# EAGLE board pcb_panel (EAGLE 6.5.0)
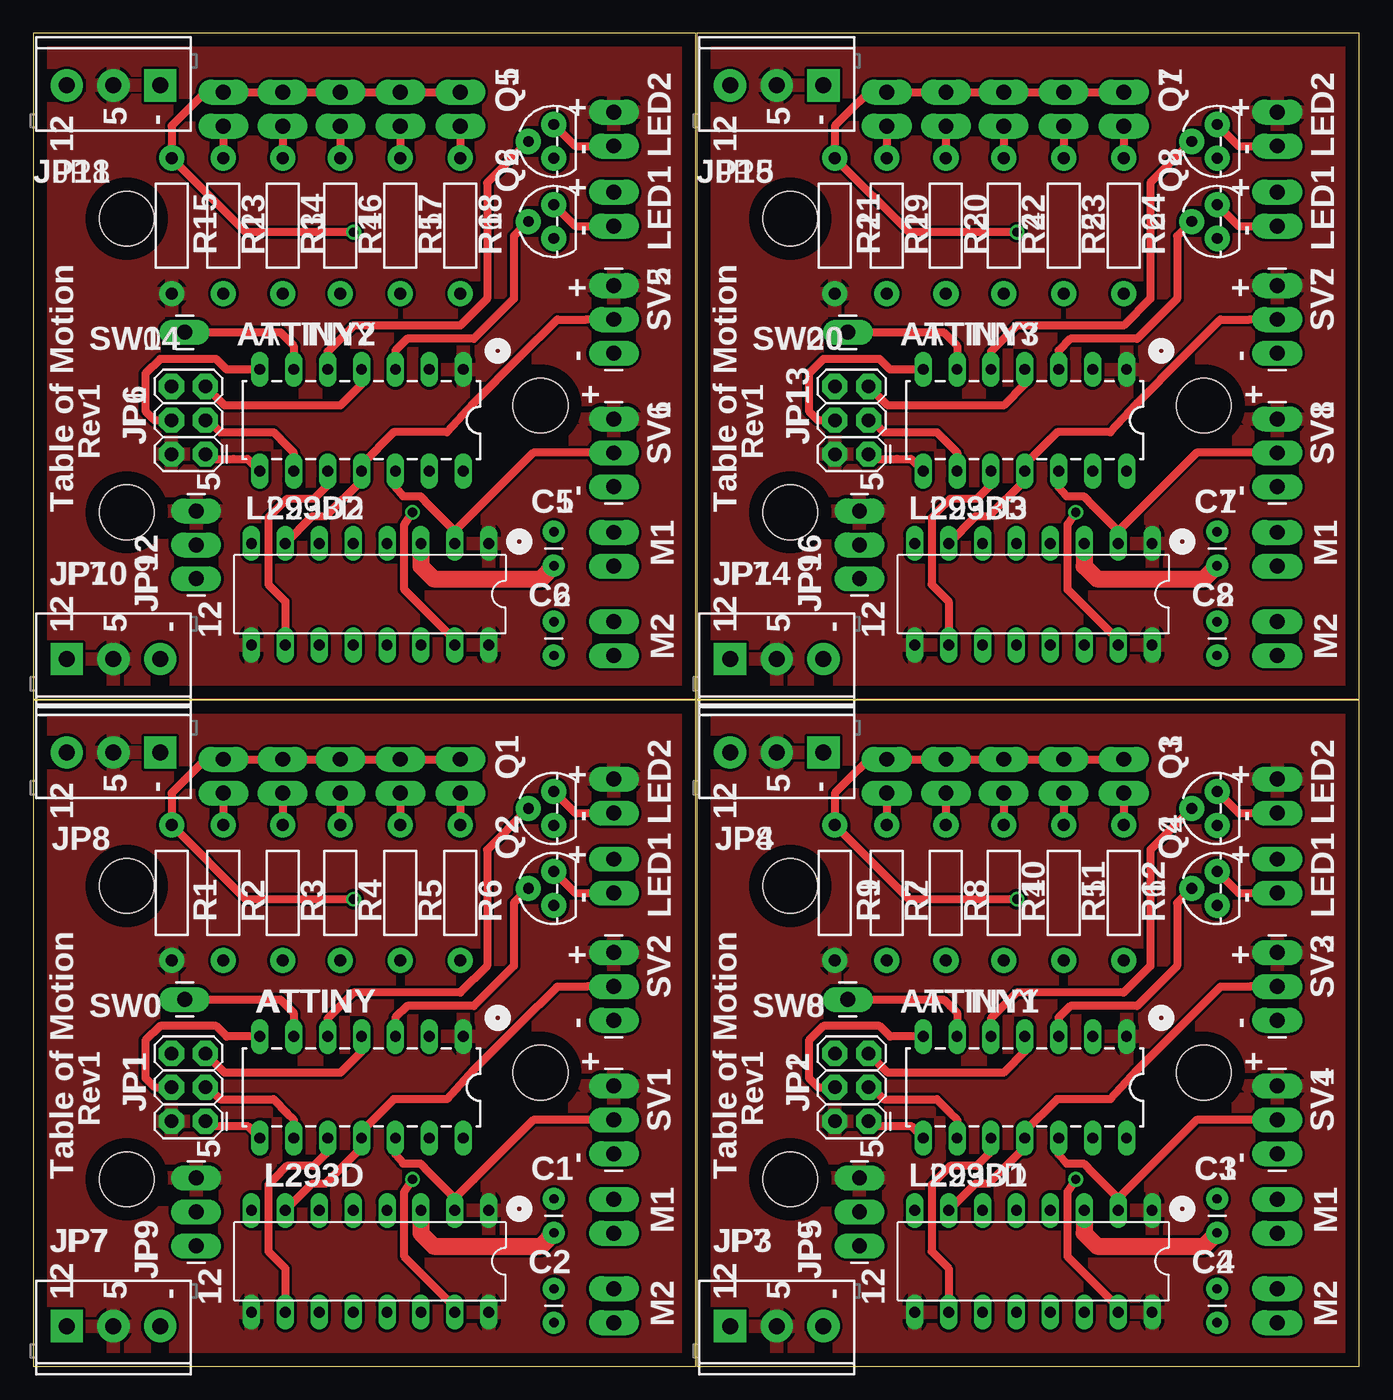
[diagram p0: board, top side]
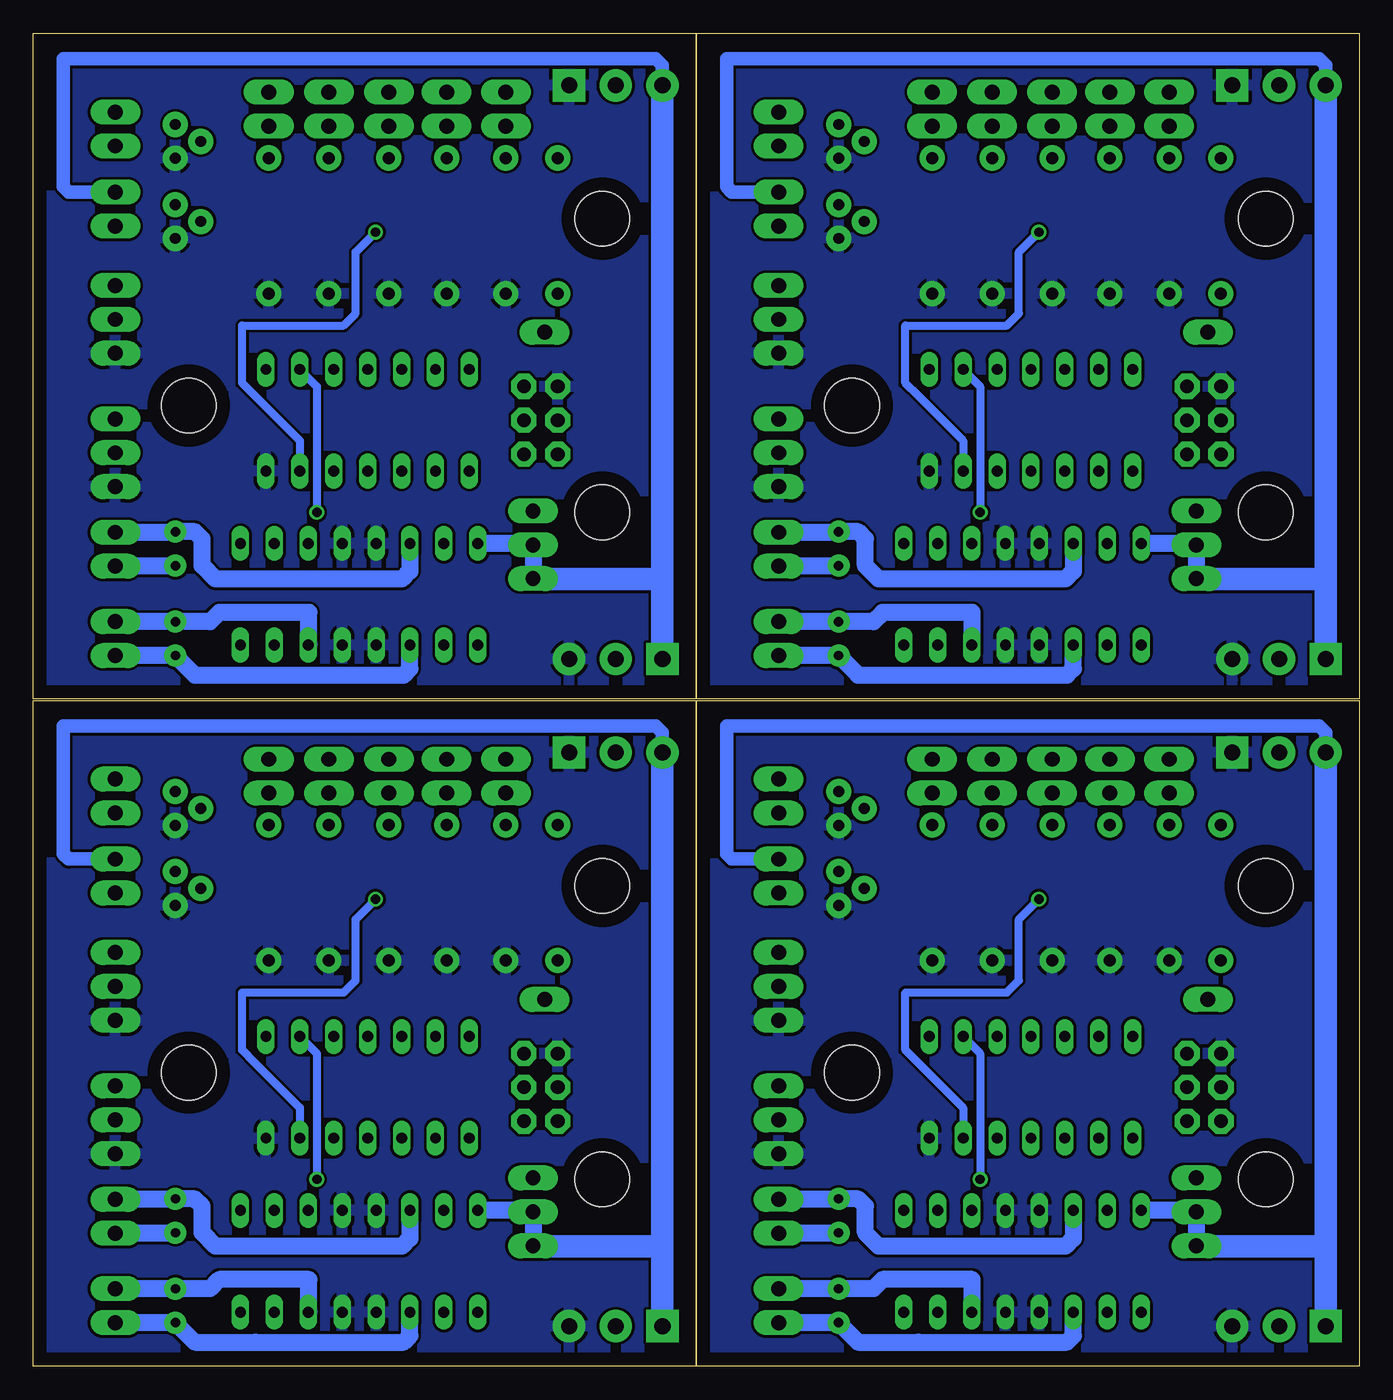
[diagram p1: board, bottom side, seen from below]

Size 99.34 x 99.9 mm. Coordinates in mm from the lower left corner, seen from the top.
Outline: 0,0 49.64,0 49.64,49.9 0,49.9 0,0
Outline: 49.7,0 99.34,0 99.34,49.9 49.7,49.9 49.7,0
Outline: 0,50 49.64,50 49.64,99.9 0,99.9 0,50
Outline: 49.7,50 99.34,50 99.34,99.9 49.7,99.9 49.7,50
Copper layers (1*16): Top 0.035mm / dielectric 1.5mm / Bottom 0.035mm
Design rules "default": minimum track width 10mil, minimum drill 24mil, track to track 8mil, track to pad 8mil, pad to pad 8mil, via to via 8mil, smd to smd 8mil, copper to edge 40mil, drill to drill 8mil, minimum pad ring 10mil, minimum via ring 8mil, stop-mask expansion 4mil, vias tented up to drill 0mil, thermal gap 10mil
Holes 4.1 mm at 7,36 7,14 38,22 56.7,36 56.7,14 87.7,22 7,86 7,64 38,72 56.7,86 56.7,64 87.7,72

## Footprints (pad centres in the part's own frame; a part is rotated, then mirrored left to right if it is on the bottom)
DIL14 = drill 0.813 long: 1 -8.89,-3.81; 2 -6.35,-3.81; 3 -3.81,-3.81; 4 -1.27,-3.81; 5 1.27,-3.81; 6 3.81,-3.81; 7 6.35,-3.81; 8 6.35,3.81; 9 3.81,3.81; 10 1.27,3.81; 11 -1.27,3.81; 12 -3.81,3.81; 13 -6.35,3.81; 14 -8.89,3.81
CAP-PTH-SMALL = drill 0.7 pad 1.651: 1 0,0; 2 2.54,0
2X3 = drill 1.016 pad 1.88 octagon: 1 0,0; 2 0,2.54; 3 2.54,0; 4 2.54,2.54; 5 5.08,0; 6 5.08,2.54
SCREWTERMINAL-3.5MM-3 = drill 1.2 pad 2.413 square: 1 0,0 | drill 1.2 pad 2.413: 2 3.5,0; 3 7,0
1X03_LONGPADS = drill 1.118 pad 1.88 long: 1 0,0; 2 2.54,0; 3 5.08,0
DIL16 = drill 0.813 long: 1 -8.89,-3.81; 2 -6.35,-3.81; 3 -3.81,-3.81; 4 -1.27,-3.81; 5 1.27,-3.81; 6 3.81,-3.81; 7 6.35,-3.81; 8 8.89,-3.81; 9 8.89,3.81; 10 6.35,3.81; 11 3.81,3.81; 12 1.27,3.81; 13 -1.27,3.81; 14 -3.81,3.81; 15 -6.35,3.81; 16 -8.89,3.81
1X02_LONGPADS = drill 1.118 pad 1.88 long: 1 0,0; 2 2.54,0
TO-92 = drill 0.813 pad 1.88: 1 -1.27,0; 2 0,1.905; 3 1.27,0
AXIAL-0.4 = drill 0.9 pad 1.88: P$1 -5.08,0; P$2 5.08,0
1X01_LONGPAD = drill 1.118 pad 1.88 long: 1 0,0

## Placement (x,y rotation side)
ATTINY  ATTINY84ATTINY84-20PU  [DIL14]  23.32,20.9 180 top
ATTINY1  ATTINY84ATTINY84-20PU  [DIL14]  73.02,20.9 180 top
ATTINY2  ATTINY84ATTINY84-20PU  [DIL14]  23.32,70.9 180 top
ATTINY3  ATTINY84ATTINY84-20PU  [DIL14]  73.02,70.9 180 top
C1  [CAP-PTH-SMALL]  39,10 90 top
C2  [CAP-PTH-SMALL]  39,5.8 270 top
C3  [CAP-PTH-SMALL]  88.7,10 90 top
C4  [CAP-PTH-SMALL]  88.7,5.8 270 top
C5  [CAP-PTH-SMALL]  39,60 90 top
C6  [CAP-PTH-SMALL]  39,55.8 270 top
C7  [CAP-PTH-SMALL]  88.7,60 90 top
C8  [CAP-PTH-SMALL]  88.7,55.8 270 top
JP1  [2X3]  12.89,18.36 90 top
JP2  [2X3]  62.59,18.36 90 top
JP3  [SCREWTERMINAL-3.5MM-3]  52.2,3 0 top
JP4  [SCREWTERMINAL-3.5MM-3]  59.2,46 180 top
JP5  [1X03_LONGPADS]  61.9,14.1 270 top
JP6  [2X3]  12.89,68.36 90 top
JP7  [SCREWTERMINAL-3.5MM-3]  2.5,3 0 top
JP8  [SCREWTERMINAL-3.5MM-3]  9.5,46 180 top
JP9  [1X03_LONGPADS]  12.2,14.1 270 top
JP10  [SCREWTERMINAL-3.5MM-3]  2.5,53 0 top
JP11  [SCREWTERMINAL-3.5MM-3]  9.5,96 180 top
JP12  [1X03_LONGPADS]  12.2,64.1 270 top
JP13  [2X3]  62.59,68.36 90 top
JP14  [SCREWTERMINAL-3.5MM-3]  52.2,53 0 top
JP15  [SCREWTERMINAL-3.5MM-3]  59.2,96 180 top
JP16  [1X03_LONGPADS]  61.9,64.1 270 top
L293D  L293D  [DIL16]  25.23,7.86 180 top
L293D1  L293D  [DIL16]  74.93,7.86 180 top
L293D2  L293D  [DIL16]  25.23,57.86 180 top
L293D3  L293D  [DIL16]  74.93,57.86 180 top
LED1  M02PTH3  [1X02_LONGPADS]  43.5,38 270 top
LED2  M02PTH3  [1X02_LONGPADS]  43.5,44 270 top
LED3  M02PTH3  [1X02_LONGPADS]  93.2,38 270 top
LED4  M02PTH3  [1X02_LONGPADS]  93.2,44 270 top
LED5  M02PTH3  [1X02_LONGPADS]  43.5,88 270 top
LED6  M02PTH3  [1X02_LONGPADS]  43.5,94 270 top
LED7  M02PTH3  [1X02_LONGPADS]  93.2,88 270 top
LED8  M02PTH3  [1X02_LONGPADS]  93.2,94 270 top
M1  M02PTH3  [1X02_LONGPADS]  43.5,12.5 270 top
M2  M02PTH3  [1X02_LONGPADS]  43.5,5.8 270 top
M3  M02PTH3  [1X02_LONGPADS]  93.2,5.8 270 top
M4  M02PTH3  [1X02_LONGPADS]  93.2,12.5 270 top
M5  M02PTH3  [1X02_LONGPADS]  43.5,55.8 270 top
M6  M02PTH3  [1X02_LONGPADS]  43.5,62.5 270 top
M7  M02PTH3  [1X02_LONGPADS]  93.2,55.8 270 top
M8  M02PTH3  [1X02_LONGPADS]  93.2,62.5 270 top
Q1  MOSFET-NCHANNEL2N7000  [TO-92]  39,41.8 90 top
Q2  MOSFET-NCHANNEL2N7000  [TO-92]  39,35.8 90 top
Q3  MOSFET-NCHANNEL2N7000  [TO-92]  88.7,41.8 90 top
Q4  MOSFET-NCHANNEL2N7000  [TO-92]  88.7,35.8 90 top
Q5  MOSFET-NCHANNEL2N7000  [TO-92]  39,91.8 90 top
Q6  MOSFET-NCHANNEL2N7000  [TO-92]  39,85.8 90 top
Q7  MOSFET-NCHANNEL2N7000  [TO-92]  88.7,91.8 90 top
Q8  MOSFET-NCHANNEL2N7000  [TO-92]  88.7,85.8 90 top
R1  [AXIAL-0.4]  10.36,35.48 270 top
R2  [AXIAL-0.4]  14.24,35.48 90 top
R3  [AXIAL-0.4]  18.68,35.48 90 top
R4  [AXIAL-0.4]  23,35.48 90 top
R5  [AXIAL-0.4]  27.5,35.48 90 top
R6  [AXIAL-0.4]  32,35.48 90 top
R7  [AXIAL-0.4]  63.94,35.48 90 top
R8  [AXIAL-0.4]  68.38,35.48 90 top
R9  [AXIAL-0.4]  60.06,35.48 270 top
R10  [AXIAL-0.4]  72.7,35.48 90 top
R11  [AXIAL-0.4]  77.2,35.48 90 top
R12  [AXIAL-0.4]  81.7,35.48 90 top
R13  [AXIAL-0.4]  14.24,85.48 90 top
R14  [AXIAL-0.4]  18.68,85.48 90 top
R15  [AXIAL-0.4]  10.36,85.48 270 top
R16  [AXIAL-0.4]  23,85.48 90 top
R17  [AXIAL-0.4]  27.5,85.48 90 top
R18  [AXIAL-0.4]  32,85.48 90 top
R19  [AXIAL-0.4]  63.94,85.48 90 top
R20  [AXIAL-0.4]  68.38,85.48 90 top
R21  [AXIAL-0.4]  60.06,85.48 270 top
R22  [AXIAL-0.4]  72.7,85.48 90 top
R23  [AXIAL-0.4]  77.2,85.48 90 top
R24  [AXIAL-0.4]  81.7,85.48 90 top
SV1  [1X03_LONGPADS]  43.5,21 270 top
SV2  [1X03_LONGPADS]  43.5,31 270 top
SV3  [1X03_LONGPADS]  93.2,31 270 top
SV4  [1X03_LONGPADS]  93.2,21 270 top
SV5  [1X03_LONGPADS]  43.5,81 270 top
SV6  [1X03_LONGPADS]  43.5,71 270 top
SV7  [1X03_LONGPADS]  93.2,81 270 top
SV8  [1X03_LONGPADS]  93.2,71 270 top
SW0  M01PTH_LONGPAD  [1X01_LONGPAD]  11.33,27.49 270 top
SW1  M02PTH3  [1X02_LONGPADS]  14.24,45.49 270 top
SW2  M02PTH3  [1X02_LONGPADS]  18.68,45.49 270 top
SW3  M02PTH3  [1X02_LONGPADS]  23,45.49 270 top
SW4  M02PTH3  [1X02_LONGPADS]  27.5,45.49 270 top
SW5  M02PTH3  [1X02_LONGPADS]  32,45.49 270 top
SW6  M02PTH3  [1X02_LONGPADS]  63.94,45.49 270 top
SW7  M02PTH3  [1X02_LONGPADS]  68.38,45.49 270 top
SW8  M01PTH_LONGPAD  [1X01_LONGPAD]  61.03,27.49 270 top
SW9  M02PTH3  [1X02_LONGPADS]  72.7,45.49 270 top
SW10  M02PTH3  [1X02_LONGPADS]  77.2,45.49 270 top
SW11  M02PTH3  [1X02_LONGPADS]  81.7,45.49 270 top
SW12  M02PTH3  [1X02_LONGPADS]  14.24,95.49 270 top
SW13  M02PTH3  [1X02_LONGPADS]  18.68,95.49 270 top
SW14  M01PTH_LONGPAD  [1X01_LONGPAD]  11.33,77.49 270 top
SW15  M02PTH3  [1X02_LONGPADS]  23,95.49 270 top
SW16  M02PTH3  [1X02_LONGPADS]  27.5,95.49 270 top
SW17  M02PTH3  [1X02_LONGPADS]  32,95.49 270 top
SW18  M02PTH3  [1X02_LONGPADS]  63.94,95.49 270 top
SW19  M02PTH3  [1X02_LONGPADS]  68.38,95.49 270 top
SW20  M01PTH_LONGPAD  [1X01_LONGPAD]  61.03,77.49 270 top
SW21  M02PTH3  [1X02_LONGPADS]  72.7,95.49 270 top
SW22  M02PTH3  [1X02_LONGPADS]  77.2,95.49 270 top
SW23  M02PTH3  [1X02_LONGPADS]  81.7,95.49 270 top

## Library data of the parts
ATTINY ATTINY1-ATTINY3 = SparkFun-DigitalIC
C1-C8 = SparkFun-Passives
JP1 JP2 JP6 JP13 = SparkFun-Connectors; PROD_ID: CONN-09701
JP3-JP5 JP7-JP12 JP14-JP16 LED1-LED8 M1-M8 SV1-SV8 SW0 SW1-SW23 = SparkFun-Connectors
L293D L293D1-L293D3 = st-microelectronics; MPN: L293D; OC_FARNELL: 9589619; OC_NEWARK: 56P8249
Q1-Q8 = SparkFun-DiscreteSemi
R1-R24 = SparkFun-Resistors

## Nets
5V: ATTINY.1 JP1.2 JP7.2 JP8.2 JP9.1 L293D.1 L293D.9 L293D.16 LED2.1 R1.P$2 SV1.1 SV2.1
5V1: ATTINY1.1 JP2.2 JP3.2 JP4.2 JP5.1 L293D1.1 L293D1.9 L293D1.16 LED4.1 R9.P$2 SV3.1 SV4.1
5V2: ATTINY2.1 JP6.2 JP10.2 JP11.2 JP12.1 L293D2.1 L293D2.9 L293D2.16 LED6.1 R15.P$2 SV5.1 SV6.1
5V3: ATTINY3.1 JP13.2 JP14.2 JP15.2 JP16.1 L293D3.1 L293D3.9 L293D3.16 LED8.1 R21.P$2 SV7.1 SV8.1
!RESET: ATTINY.4 JP1.5
!RESET1: ATTINY1.4 JP2.5
!RESET2: ATTINY2.4 JP6.5
!RESET3: ATTINY3.4 JP13.5
CONTROL1: ATTINY.12 L293D.2 SV1.2
CONTROL2: ATTINY.11 L293D.7 SV2.2
CONTROL3: ATTINY.10 L293D.10
CONTROL4: ATTINY.2 L293D.15
CONTROL5: ATTINY1.12 L293D1.2 SV4.2
CONTROL6: ATTINY1.11 L293D1.7 SV3.2
CONTROL7: ATTINY1.2 L293D1.15
CONTROL8: ATTINY1.10 L293D1.10
CONTROL9: ATTINY2.12 L293D2.2 SV6.2
CONTROL10: ATTINY2.11 L293D2.7 SV5.2
CONTROL11: ATTINY2.2 L293D2.15
CONTROL12: ATTINY2.10 L293D2.10
CONTROL13: ATTINY3.12 L293D3.2 SV8.2
CONTROL14: ATTINY3.11 L293D3.7 SV7.2
CONTROL15: ATTINY3.2 L293D3.15
CONTROL16: ATTINY3.10 L293D3.10
GND: ATTINY.14 JP1.6 JP7.3 JP8.1 L293D.4 L293D.5 L293D.12 L293D.13 Q1.1 Q2.1 R2.P$1 R3.P$1 R4.P$1 R5.P$1 R6.P$1 SV1.3 SV2.3
GND1: ATTINY1.14 JP2.6 JP3.3 JP4.1 L293D1.4 L293D1.5 L293D1.12 L293D1.13 Q3.1 Q4.1 R7.P$1 R8.P$1 R10.P$1 R11.P$1 R12.P$1 SV3.3 SV4.3
GND2: ATTINY2.14 JP6.6 JP10.3 JP11.1 L293D2.4 L293D2.5 L293D2.12 L293D2.13 Q5.1 Q6.1 R13.P$1 R14.P$1 R16.P$1 R17.P$1 R18.P$1 SV5.3 SV6.3
GND3: ATTINY3.14 JP13.6 JP14.3 JP15.1 L293D3.4 L293D3.5 L293D3.12 L293D3.13 Q7.1 Q8.1 R19.P$1 R20.P$1 R22.P$1 R23.P$1 R24.P$1 SV7.3 SV8.3
LEDCONTROL1: ATTINY.3 Q2.2
LEDCONTROL2: ATTINY.5 Q1.2
LEDCONTROL3: ATTINY1.3 Q4.2
LEDCONTROL4: ATTINY1.5 Q3.2
LEDCONTROL5: ATTINY2.3 Q6.2
LEDCONTROL6: ATTINY2.5 Q5.2
LEDCONTROL7: ATTINY3.3 Q8.2
LEDCONTROL8: ATTINY3.5 Q7.2
LIMITSWITCH: ATTINY.13 R1.P$1 SW1.1 SW2.1 SW3.1 SW4.1 SW5.1
LIMITSWITCH1: ATTINY1.13 R9.P$1 SW6.1 SW7.1 SW9.1 SW10.1 SW11.1
LIMITSWITCH2: ATTINY2.13 R15.P$1 SW12.1 SW13.1 SW15.1 SW16.1 SW17.1
LIMITSWITCH3: ATTINY3.13 R21.P$1 SW18.1 SW19.1 SW21.1 SW22.1 SW23.1
MISO: ATTINY.8 JP1.1
MISO1: ATTINY1.8 JP2.1
MISO2: ATTINY2.8 JP6.1
MISO3: ATTINY3.8 JP13.1
MOSI: ATTINY.7 JP1.4
MOSI1: ATTINY1.7 JP2.4
MOSI2: ATTINY2.7 JP6.4
MOSI3: ATTINY3.7 JP13.4
N$1: C2.1 L293D.14 M2.1
N$3: ATTINY.6 SW0.1
N$4: C4.1 L293D1.14 M3.1
N$5: C2.2 L293D.11 M2.2
N$6: C1.1 L293D.3 M1.2
N$7: C1.2 L293D.6 M1.1
N$8: C4.2 L293D1.11 M3.2
N$9: C3.1 L293D1.3 M4.2
N$10: C3.2 L293D1.6 M4.1
N$11: R7.P$2 SW6.2
N$12: R2.P$2 SW1.2
N$13: R3.P$2 SW2.2
N$14: R8.P$2 SW7.2
N$15: ATTINY1.6 SW8.1
N$16: LED3.2 Q4.3
N$17: JP9.2 L293D.8
N$18: LED1.2 Q2.3
N$19: LED2.2 Q1.3
N$20: LED4.2 Q3.3
N$21: R10.P$2 SW9.2
N$22: R4.P$2 SW3.2
N$23: R11.P$2 SW10.2
N$24: R5.P$2 SW4.2
N$25: R12.P$2 SW11.2
N$26: R6.P$2 SW5.2
N$27: JP5.2 L293D1.8
N$29: C6.1 L293D2.14 M5.1
N$30: C6.2 L293D2.11 M5.2
N$31: C5.1 L293D2.3 M6.2
N$32: C5.2 L293D2.6 M6.1
N$33: R13.P$2 SW12.2
N$34: R14.P$2 SW13.2
N$35: ATTINY2.6 SW14.1
N$36: LED5.2 Q6.3
N$37: LED6.2 Q5.3
N$38: R16.P$2 SW15.2
N$39: R17.P$2 SW16.2
N$40: R18.P$2 SW17.2
N$41: JP12.2 L293D2.8
N$43: C8.1 L293D3.14 M7.1
N$44: C8.2 L293D3.11 M7.2
N$45: C7.1 L293D3.3 M8.2
N$46: C7.2 L293D3.6 M8.1
N$47: R19.P$2 SW18.2
N$48: R20.P$2 SW19.2
N$49: ATTINY3.6 SW20.1
N$50: LED7.2 Q8.3
N$51: LED8.2 Q7.3
N$52: R22.P$2 SW21.2
N$53: R23.P$2 SW22.2
N$54: R24.P$2 SW23.2
N$55: JP16.2 L293D3.8
SCL: ATTINY.9 JP1.3
SCL1: ATTINY1.9 JP2.3
SCL2: ATTINY2.9 JP6.3
SCL3: ATTINY3.9 JP13.3
VCC: JP7.1 JP8.3 JP9.3 LED1.1
VCC1: JP3.1 JP4.3 JP5.3 LED3.1
VCC2: JP10.1 JP11.3 JP12.3 LED5.1
VCC3: JP14.1 JP15.3 JP16.3 LED7.1

## Tracks (layer width: path | path; a pad name or v marks a point on that pad's centre or on a via)
5V
  pour Top: 0,0 50,0 50,50 0,50
5V1
  pour Top: 49.7,0 99.7,0 99.7,50 49.7,50
5V2
  pour Top: 0,50 50,50 50,100 0,100
5V3
  pour Top: 49.7,50 99.7,50 99.7,100 49.7,100
!RESET
  Top 0.61: JP1.5 14.33,22 23,22 24.59,23.59 ATTINY.4
!RESET1
  Top 0.61: JP2.5 64.03,22 72.7,22 74.29,23.59 ATTINY1.4
!RESET2
  Top 0.61: JP6.5 14.33,72 23,72 24.59,73.59 ATTINY2.4
!RESET3
  Top 0.61: JP13.5 64.03,72 72.7,72 74.29,73.59 ATTINY3.4
CONTROL1
  Top 0.61: SV1.2 37.46,18.46 33,14 31.58,12.58 | 31.58,12.58 29.66,14.5 29,15.2 27.7,15.2 27.13,15.87 ATTINY.12 | 31.58,11.42 L293D.2 31.58,12.58
CONTROL2
  Top 0.61: SV2.2 41.46,28.46 39.26,28.46 39.2,28.4 36.5,25.7 33,22.2 31,20 27,20 24.59,17.59 ATTINY.11 24.59,16.39 21.9,13.7 20.91,13.7 L293D.7
CONTROL3
  Top 0.61: ATTINY.10 22.05,16.05 21,15 19,15 18,14 17.6,13.6 17.6,8.6 18.88,7.32 L293D.10
CONTROL4  (via drill 0.7)
  Top 0.61: v28.4,14 27.8,13.1 27.8,8.2 29,7 31.58,4.42 L293D.15
  Bottom 0.61: ATTINY.2 28.4,23.44 v28.4,14
CONTROL5
  Top 0.61: SV4.2 87.16,18.46 82.7,14 81.28,12.58 | 81.28,12.58 79.36,14.5 78.7,15.2 77.4,15.2 76.83,15.87 ATTINY1.12 | 81.28,11.42 L293D1.2 81.28,12.58
CONTROL6
  Top 0.61: SV3.2 91.16,28.46 88.96,28.46 88.9,28.4 86.2,25.7 82.7,22.2 80.7,20 76.7,20 74.29,17.59 ATTINY1.11 74.29,16.39 71.6,13.7 70.61,13.7 L293D1.7
CONTROL7  (via drill 0.7)
  Top 0.61: v78.1,14 77.5,13.1 77.5,8.2 78.7,7 81.28,4.42 L293D1.15
  Bottom 0.61: ATTINY1.2 78.1,23.44 v78.1,14
CONTROL8
  Top 0.61: ATTINY1.10 71.75,16.05 70.7,15 68.7,15 67.7,14 67.3,13.6 67.3,8.6 68.58,7.32 L293D1.10
CONTROL9
  Top 0.61: SV6.2 37.46,68.46 33,64 31.58,62.58 | 31.58,62.58 29.66,64.5 29,65.2 27.7,65.2 27.13,65.87 ATTINY2.12 | 31.58,61.42 L293D2.2 31.58,62.58
CONTROL10
  Top 0.61: SV5.2 41.46,78.46 39.26,78.46 39.2,78.4 36.5,75.7 33,72.2 31,70 27,70 24.59,67.59 ATTINY2.11 24.59,66.39 21.9,63.7 20.91,63.7 L293D2.7
CONTROL11  (via drill 0.7)
  Top 0.61: v28.4,64 27.8,63.1 27.8,58.2 29,57 31.58,54.42 L293D2.15
  Bottom 0.61: ATTINY2.2 28.4,73.44 v28.4,64
CONTROL12
  Top 0.61: ATTINY2.10 22.05,66.05 21,65 19,65 18,64 17.6,63.6 17.6,58.6 18.88,57.32 L293D2.10
CONTROL13
  Top 0.61: SV8.2 87.16,68.46 82.7,64 81.28,62.58 | 81.28,62.58 79.36,64.5 78.7,65.2 77.4,65.2 76.83,65.87 ATTINY3.12 | 81.28,61.42 L293D3.2 81.28,62.58
CONTROL14
  Top 0.61: SV7.2 91.16,78.46 88.96,78.46 88.9,78.4 86.2,75.7 82.7,72.2 80.7,70 76.7,70 74.29,67.59 ATTINY3.11 74.29,66.39 71.6,63.7 70.61,63.7 L293D3.7
CONTROL15  (via drill 0.7)
  Top 0.61: v78.1,64 77.5,63.1 77.5,58.2 78.7,57 81.28,54.42 L293D3.15
  Bottom 0.61: ATTINY3.2 78.1,73.44 v78.1,64
CONTROL16
  Top 0.61: ATTINY3.10 71.75,66.05 70.7,65 68.7,65 67.7,64 67.3,63.6 67.3,58.6 68.58,57.32 L293D3.10
GND
  pour Bottom: 0,0 50,0 50,50 0,50
GND1
  pour Bottom: 49.7,0 99.7,0 99.7,50 49.7,50
GND2
  pour Bottom: 0,50 50,50 50,100 0,100
GND3
  pour Bottom: 49.7,50 99.7,50 99.7,100 49.7,100
LEDCONTROL1
  Top 0.61: ATTINY.3 27.13,26.13 28,27 33,27 36,30 36,34.7 Q2.2
LEDCONTROL2
  Top 0.61: ATTINY.5 22.05,26.05 24,28 32,28 34,30 34,38.7 Q1.2
LEDCONTROL3
  Top 0.61: ATTINY1.3 76.83,26.13 77.7,27 82.7,27 85.7,30 85.7,34.7 Q4.2
LEDCONTROL4
  Top 0.61: ATTINY1.5 71.75,26.05 73.7,28 81.7,28 83.7,30 83.7,38.7 Q3.2
LEDCONTROL5
  Top 0.61: ATTINY2.3 27.13,76.13 28,77 33,77 36,80 36,84.7 Q6.2
LEDCONTROL6
  Top 0.61: ATTINY2.5 22.05,76.05 24,78 32,78 34,80 34,88.7 Q5.2
LEDCONTROL7
  Top 0.61: ATTINY3.3 76.83,76.13 77.7,77 82.7,77 85.7,80 85.7,84.7 Q8.2
LEDCONTROL8
  Top 0.61: ATTINY3.5 71.75,76.05 73.7,78 81.7,78 83.7,80 83.7,88.7 Q7.2
LIMITSWITCH  (via drill 0.7)
  Top 0.61: SW5.1 SW4.1 SW3.1 SW2.1 SW1.1 12.89,45.49 11.3,43.9 10.36,42.96 R1.P$1 15.92,35 v24,35
  Bottom 0.61: v24,35 25.5,33.5 25.5,28.9 26.4,28 34,28 34,23.7 33,22.7 29.67,19.37 ATTINY.13
LIMITSWITCH1  (via drill 0.7)
  Top 0.61: SW11.1 SW10.1 SW9.1 SW7.1 SW6.1 62.59,45.49 61,43.9 60.06,42.96 R9.P$1 65.62,35 v73.7,35
  Bottom 0.61: v73.7,35 75.2,33.5 75.2,28.9 76.1,28 83.7,28 83.7,23.7 82.7,22.7 79.37,19.37 ATTINY1.13
LIMITSWITCH2  (via drill 0.7)
  Top 0.61: SW17.1 SW16.1 SW15.1 SW13.1 SW12.1 12.89,95.49 11.3,93.9 10.36,92.96 R15.P$1 15.92,85 v24,85
  Bottom 0.61: v24,85 25.5,83.5 25.5,78.9 26.4,78 34,78 34,73.7 33,72.7 29.67,69.37 ATTINY2.13
LIMITSWITCH3  (via drill 0.7)
  Top 0.61: SW23.1 SW22.1 SW21.1 SW19.1 SW18.1 62.59,95.49 61,93.9 60.06,92.96 R21.P$1 65.62,85 v73.7,85
  Bottom 0.61: v73.7,85 75.2,83.5 75.2,78.9 76.1,78 83.7,78 83.7,73.7 82.7,72.7 79.37,69.37 ATTINY3.13
MISO
  Top 0.61: ATTINY.8 16.06,18 15,18 13.25,18 JP1.1
MISO1
  Top 0.61: ATTINY1.8 65.76,18 64.7,18 62.95,18 JP2.1
MISO2
  Top 0.61: ATTINY2.8 16.06,68 15,68 13.25,68 JP6.1
MISO3
  Top 0.61: ATTINY3.8 65.76,68 64.7,68 62.95,68 JP13.1
MOSI
  Top 0.61: ATTINY.7 14.49,24.71 13.7,25.5 9.5,25.5 8.4,24.4 8.4,21.6 9,21 9.1,20.9 JP1.4
MOSI1
  Top 0.61: ATTINY1.7 64.19,24.71 63.4,25.5 59.2,25.5 58.1,24.4 58.1,21.6 58.7,21 58.8,20.9 JP2.4
MOSI2
  Top 0.61: ATTINY2.7 14.49,74.71 13.7,75.5 9.5,75.5 8.4,74.4 8.4,71.6 9,71 9.1,70.9 JP6.4
MOSI3
  Top 0.61: ATTINY3.7 64.19,74.71 63.4,75.5 59.2,75.5 58.1,74.4 58.1,71.6 58.7,71 58.8,70.9 JP13.4
N$1
  Bottom 1.27: M2.1 C2.1 36.4,5.8 35.7,6.5 29,6.5 29,4.09 L293D.14
N$2
  Bottom 1.27: 12.2,11.5 12.2,9
N$3
  Top 0.61: SW0.1 18.51,27.49 19,27 19.51,26.49 ATTINY.6
N$4
  Bottom 1.27: M3.1 C4.1 86.1,5.8 85.4,6.5 78.7,6.5 78.7,4.09 L293D1.14
N$5
  Bottom 1.27: M2.2 C2.2 37.54,1.8 33,1.8 21.9,1.8 21.42,2.28 L293D.11
N$6
  Top 1.27: L293D.3 29.04,9.96 30,9 38,9 C1.1
  Bottom 1.27: C1.1 39.04,9.96 M1.2
N$7
  Bottom 1.27: M1.1 39.04,12.5 C1.2 37.54,12.54 37,12 37,10 36,9 22,9 21.42,9.58 L293D.6
N$8
  Bottom 1.27: M3.2 C4.2 87.24,1.8 82.7,1.8 71.6,1.8 71.12,2.28 L293D1.11
N$9
  Top 1.27: L293D1.3 78.74,9.96 79.7,9 87.7,9 C3.1
  Bottom 1.27: C3.1 88.74,9.96 M4.2
N$10
  Bottom 1.27: M4.1 88.74,12.5 C3.2 87.24,12.54 86.7,12 86.7,10 85.7,9 71.7,9 71.12,9.58 L293D1.6
N$11
  Top 0.61: SW6.2 R7.P$2
N$12
  Top 0.61: SW1.2 R2.P$2
N$13
  Top 0.61: SW2.2 R3.P$2
N$14
  Top 0.61: SW7.2 R8.P$2
N$15
  Top 0.61: SW8.1 68.21,27.49 68.7,27 69.21,26.49 ATTINY1.6
N$16
  Top 0.61: Q4.3 90.31,35.46 LED3.2
N$17
  Bottom 1.27: JP9.2 12.11,11.67 L293D.8
N$18
  Top 0.61: Q2.3 40.61,35.46 LED1.2
N$19
  Top 0.61: Q1.3 40.61,41.46 LED2.2
N$20
  Top 0.61: Q3.3 90.31,41.46 LED4.2
N$21
  Top 0.61: SW9.2 R10.P$2
N$22
  Top 0.61: SW3.2 R4.P$2
N$23
  Top 0.61: SW10.2 R11.P$2
N$24
  Top 0.61: SW4.2 R5.P$2
N$25
  Top 0.61: SW11.2 R12.P$2
N$26
  Top 0.61: SW5.2 R6.P$2
N$27
  Bottom 1.27: JP5.2 61.81,11.67 L293D1.8
N$28
  Bottom 1.27: 61.9,11.5 61.9,9
N$29
  Bottom 1.27: M5.1 C6.1 36.4,55.8 35.7,56.5 29,56.5 29,54.09 L293D2.14
N$30
  Bottom 1.27: M5.2 C6.2 37.54,51.8 33,51.8 21.9,51.8 21.42,52.28 L293D2.11
N$31
  Top 1.27: L293D2.3 29.04,59.96 30,59 38,59 C5.1
  Bottom 1.27: C5.1 39.04,59.96 M6.2
N$32
  Bottom 1.27: M6.1 39.04,62.5 C5.2 37.54,62.54 37,62 37,60 36,59 22,59 21.42,59.58 L293D2.6
N$33
  Top 0.61: SW12.2 R13.P$2
N$34
  Top 0.61: SW13.2 R14.P$2
N$35
  Top 0.61: SW14.1 18.51,77.49 19,77 19.51,76.49 ATTINY2.6
N$36
  Top 0.61: Q6.3 40.61,85.46 LED5.2
N$37
  Top 0.61: Q5.3 40.61,91.46 LED6.2
N$38
  Top 0.61: SW15.2 R16.P$2
N$39
  Top 0.61: SW16.2 R17.P$2
N$40
  Top 0.61: SW17.2 R18.P$2
N$41
  Bottom 1.27: JP12.2 12.11,61.67 L293D2.8
N$42
  Bottom 1.27: 12.2,61.5 12.2,59
N$43
  Bottom 1.27: M7.1 C8.1 86.1,55.8 85.4,56.5 78.7,56.5 78.7,54.09 L293D3.14
N$44
  Bottom 1.27: M7.2 C8.2 87.24,51.8 82.7,51.8 71.6,51.8 71.12,52.28 L293D3.11
N$45
  Top 1.27: L293D3.3 78.74,59.96 79.7,59 87.7,59 C7.1
  Bottom 1.27: C7.1 88.74,59.96 M8.2
N$46
  Bottom 1.27: M8.1 88.74,62.5 C7.2 87.24,62.54 86.7,62 86.7,60 85.7,59 71.7,59 71.12,59.58 L293D3.6
N$47
  Top 0.61: SW18.2 R19.P$2
N$48
  Top 0.61: SW19.2 R20.P$2
N$49
  Top 0.61: SW20.1 68.21,77.49 68.7,77 69.21,76.49 ATTINY3.6
N$50
  Top 0.61: Q8.3 90.31,85.46 LED7.2
N$51
  Top 0.61: Q7.3 90.31,91.46 LED8.2
N$52
  Top 0.61: SW21.2 R22.P$2
N$53
  Top 0.61: SW22.2 R23.P$2
N$54
  Top 0.61: SW23.2 R24.P$2
N$55
  Bottom 1.27: JP16.2 61.81,61.67 L293D3.8
N$56
  Bottom 1.27: 61.9,61.5 61.9,59
SCL
  Top 0.61: ATTINY.9 19.51,18.49 19,19 18,20 14,20 13.1,20.9 JP1.3
SCL1
  Top 0.61: ATTINY1.9 69.21,18.49 68.7,19 67.7,20 63.7,20 62.8,20.9 JP2.3
SCL2
  Top 0.61: ATTINY2.9 19.51,68.49 19,69 18,70 14,70 13.1,70.9 JP6.3
SCL3
  Top 0.61: ATTINY3.9 69.21,68.49 68.7,69 67.7,70 63.7,70 62.8,70.9 JP13.3
VCC
  Bottom 1.016: LED1.1 47,38 47.4,38.4 47.4,48 3,48 2.5,47.5 JP8.3
  Bottom 1.676: JP8.3 2.5,25 2.5,9 | 2.5,9 JP7.1 | JP9.3 11.98,9 2.5,9
VCC1
  Bottom 1.016: LED3.1 96.7,38 97.1,38.4 97.1,48 52.7,48 52.2,47.5 JP4.3
  Bottom 1.676: JP4.3 52.2,25 52.2,9 | 52.2,9 JP3.1 | JP5.3 61.68,9 52.2,9
VCC2
  Bottom 1.016: LED5.1 47,88 47.4,88.4 47.4,98 3,98 2.5,97.5 JP11.3
  Bottom 1.676: JP11.3 2.5,75 2.5,59 | 2.5,59 JP10.1 | JP12.3 11.98,59 2.5,59
VCC3
  Bottom 1.016: LED7.1 96.7,88 97.1,88.4 97.1,98 52.7,98 52.2,97.5 JP15.3
  Bottom 1.676: JP15.3 52.2,75 52.2,59 | 52.2,59 JP14.1 | JP16.3 61.68,59 52.2,59

## Text on the board
_tNames: LED2 | LED2 | Q1 | + | Q1 | + | 5 | - | 5 | - | 12 | - | 12 | - | JP8 | LED1 | JP8 | LED1 | Q2 | + | Q2 | + | - | - | R1 | R2 | R3 | R4 | R5 | R6 | R1 | R2 | R3 | R4 | R5 | R6 | SV2 | SV2 | + | + | ATTINY | ATTINY | SW0 | SW0 | - | - | + | SV1 | + | SV1 | JP1 | JP1 | Rev1 | Rev1 | 5 | C1 | 5 | C1 | L293D | - | L293D | - | Table of Motion | Table of Motion | M1 | M1 | JP7 | C2 | JP7 | C2 | JP9 | JP9 | 12 | 5 | - | 12 | 12 | 5 | - | 12 | M2 | M2 | LED2 | LED2 | Q1 | + | Q1 | + | 5 | - | 5 | - | 12 | - | 12 | - | JP8 | LED1 | JP8 | LED1 | Q2 | + | Q2 | + | - | - | R1 | R2 | R3 | R4 | R5 | R6 | R1 | R2 | R3 | R4 | R5 | R6 | SV2 | SV2 | + | + | ATTINY | ATTINY | SW0 | SW0 | - | - | + | SV1 | + | SV1 | JP1 | JP1 | Rev1 | Rev1 | 5 | C1 | 5 | C1 | L293D | - | L293D | - | Table of Motion | Table of Motion | M1 | M1 | JP7 | C2 | JP7 | C2 | JP9 | JP9 | 12 | 5 | - | 12 | 12 | 5 | - | 12 | M2 | M2
_tValues: L293D | L293D | L293D | L293D